# Altium PCB NIR.PcbDoc
Units mil, origin at the board's own origin, x right, y up, seen from the top; angles counter-clockwise.
Board outline 1040 x 1040 mil, 2 copper layers (Top Layer, Bottom Layer); 1 components, 4 nets, 8 pads, 0 vias.
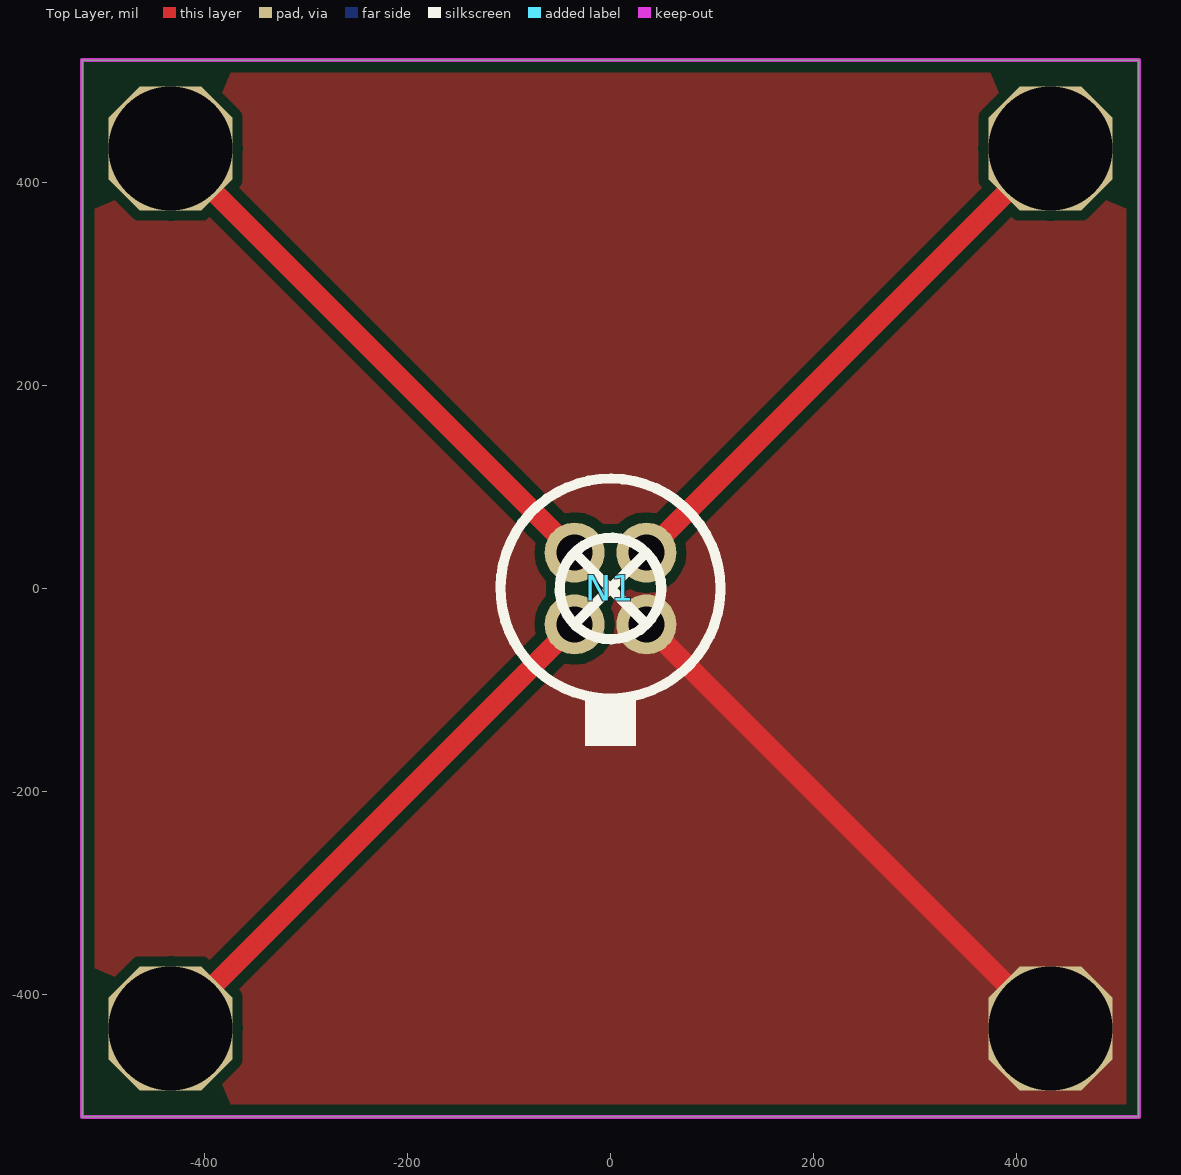
[diagram p0: Top Layer view]
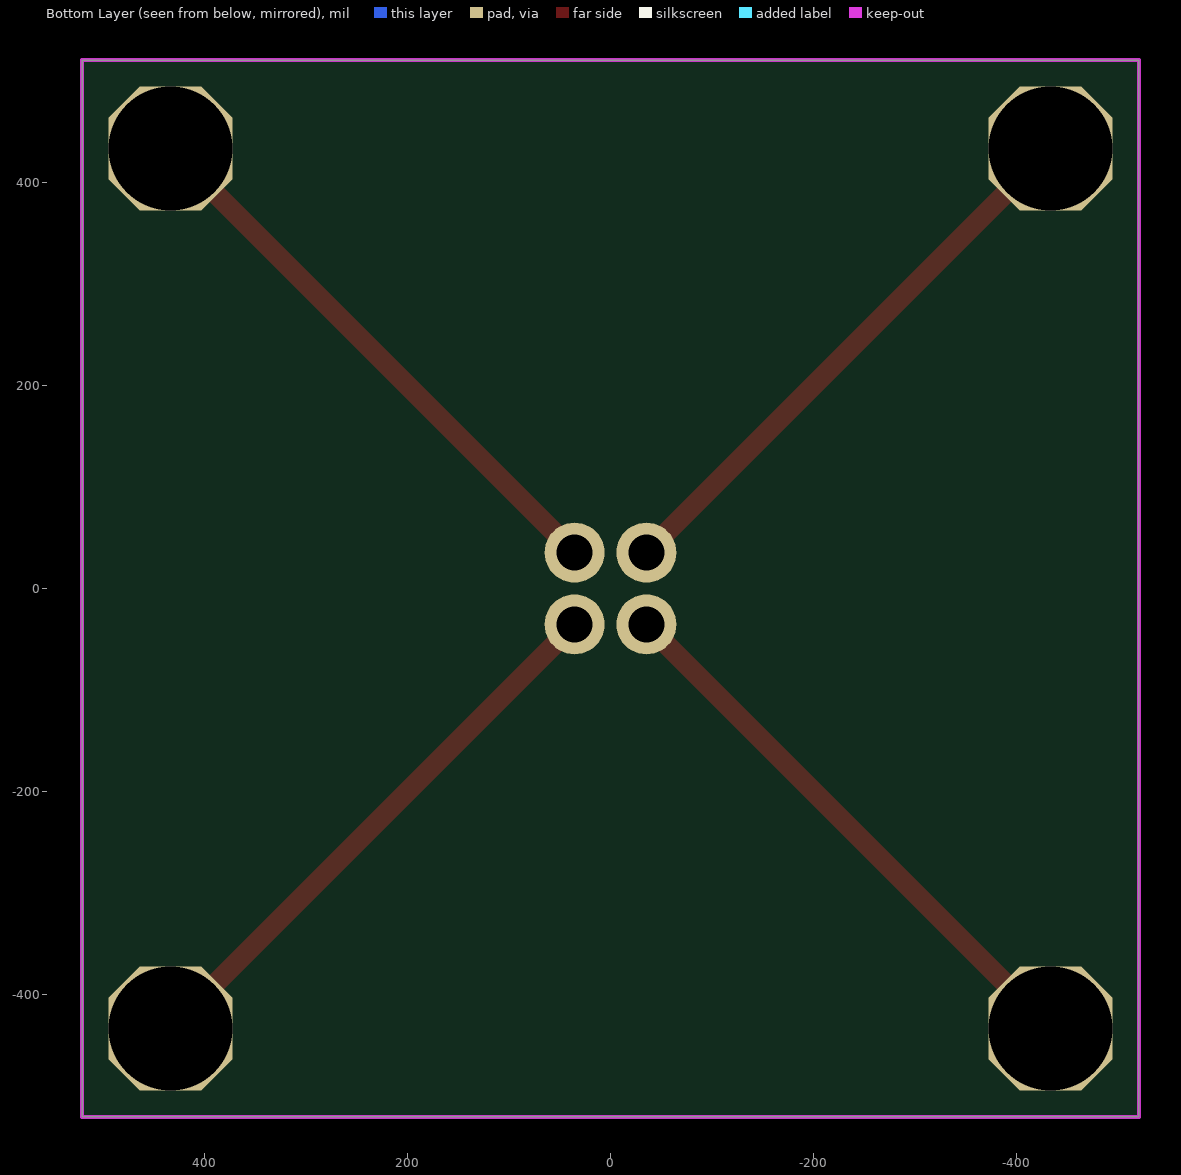
[diagram p1: Bottom Layer view, seen from below]

## Layer stack, top to bottom
Top Solder: solder mask 0.4, Solder Resist, Dk 3.5
Top Layer: signal copper 1.4
Dielectric 1: dielectric 12.6, FR-4, Dk 4.8
Bottom Layer: signal copper 1.4
Bottom Solder: solder mask 0.4, Solder Resist, Dk 3.5

## Board outline
-520,-520 520,-520 520,520 -520,520

## Design rules (kind name [scope] priority, off if disabled: settings)
Clearance [All] p1: gap=10 ignorepadtopadclearanceinfootprint=FALSE
HoleSize [All] p1: absolutevalues=TRUE maxlimit=99999 minlimit=12 maxpercent=80.000 minpercent=20.000
MinimumSolderMaskSliver [All] p1: minsoldermaskwidth=0
PolygonConnect [All] p1: connectstyle=Direct reliefconductorwidth=10 reliefentries=4 polygonreliefangle="90 Angle" airgapwidth=10
RoutingVias [All] p1: holewidth=28 width=50 viastyle="Through Hole" minholewidth=28 minwidth=50 maxholewidth=28 maxwidth=50
SilkToSilkClearance [All] p1: silktosilkclearance=0
SolderMaskExpansion [All] p1: expansion=4
Width [All] p1: maxlimit=1000 minlimit=10 preferedwidth=10
27 further rules are at their usual default settings.

## Components (designator, comment, footprint, x,y, rotation, side; value= is the part's Value field where it differs from the comment)
N1 "NIRLED" OTP 0,0 r0 top

## Footprints (in the part's own frame and the unit in brackets; to place one, negate y for a bottom-side part, rotate by r counter-clockwise, add the part's x,y. Pads: shape width x height; smd on the part's side, far side on the other; paste and mask are expansions set on the pad)
OTP [mm]
  round 1.5 hole 0.9: 1(0.898,-0.898) 2(0.898,0.898) 3(-0.898,0.898) 4(-0.898,-0.898)
  silkscreen extent -2.75,-3.94 2.75,2.75

## Free pads (board coordinates)
  oct 122.05x122.05 hole 122.05: 6(433,433) 7(433,-433) 8(-433,-433) 9(-433,433)

## Nets (pads, with @x,y where several pads share a name; then routed paths per layer and width w, separated by ;. In a path a pad name is that pad's centre, name@x,y a point inside that pad or via, vN(x,y) a via of type N, cw(c..) or ccw(c..) an arc to the next point about the centre after c; other vN are vias at no path point)
A: N1.1 pad.7 | length 562.4
  Top Layer w20: N1.1 pad.7
B: N1.2 pad.6 | length 562.4
  Top Layer w20: N1.2 pad.6
C: N1.3 pad.9 | length 562.4
  Top Layer w20: pad.9 N1.3
D: N1.4 pad.8 | length 562.4
  Top Layer w20: pad.8 N1.4

## Polygon pours and split planes (outlines as drawn)
A on Top Layer "A_L01_P000" (solid, pour order 0): -520,520 520,520 520,-520 -520,-520

## Keep-outs
Keep-Out Layer:
  the board outline again, w4